# Altium PCB hv_psu_v100.PcbDoc
Units mil, origin at the board's own origin, x right, y up, seen from the top; angles counter-clockwise.
Board outline 3543.31 x 2559.06 mil, 2 copper layers (Top Layer, Bottom Layer); 106 components, 56 nets, 254 pads, 85 vias.
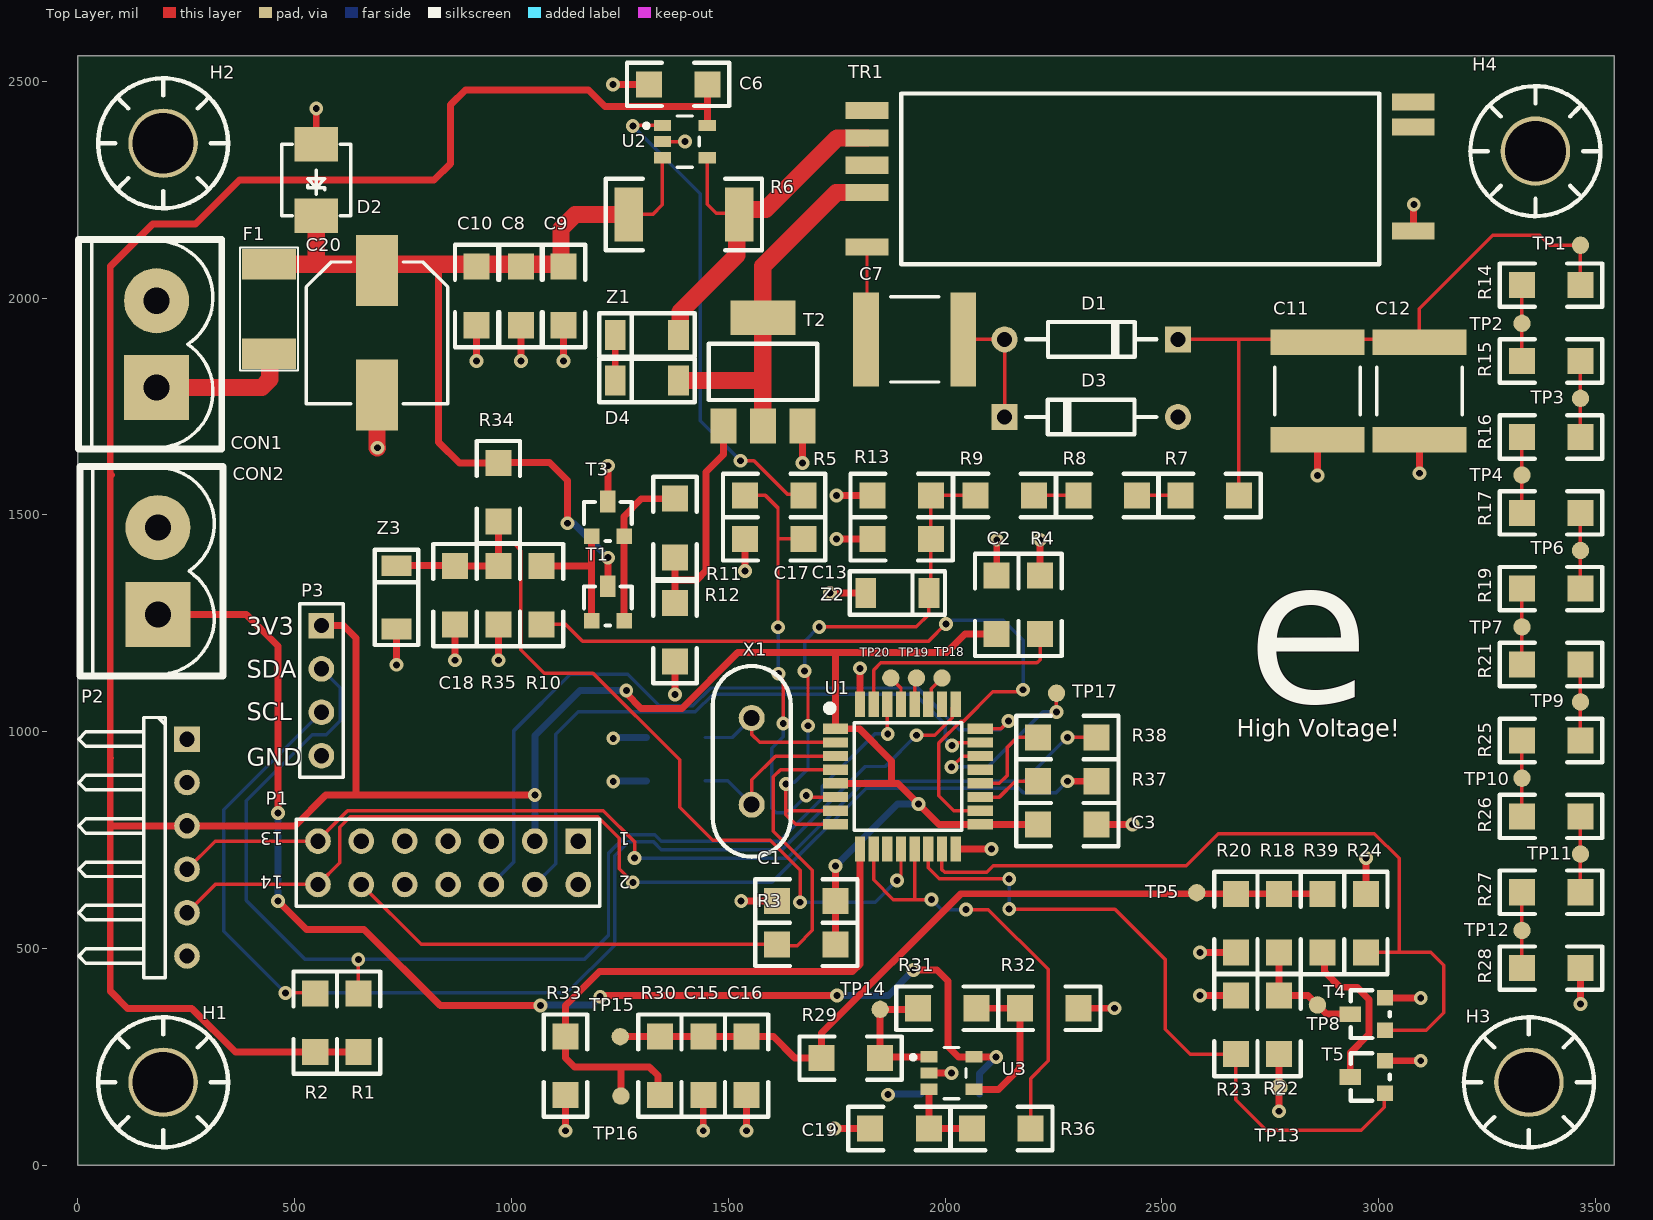
[diagram p0: Top Layer view]
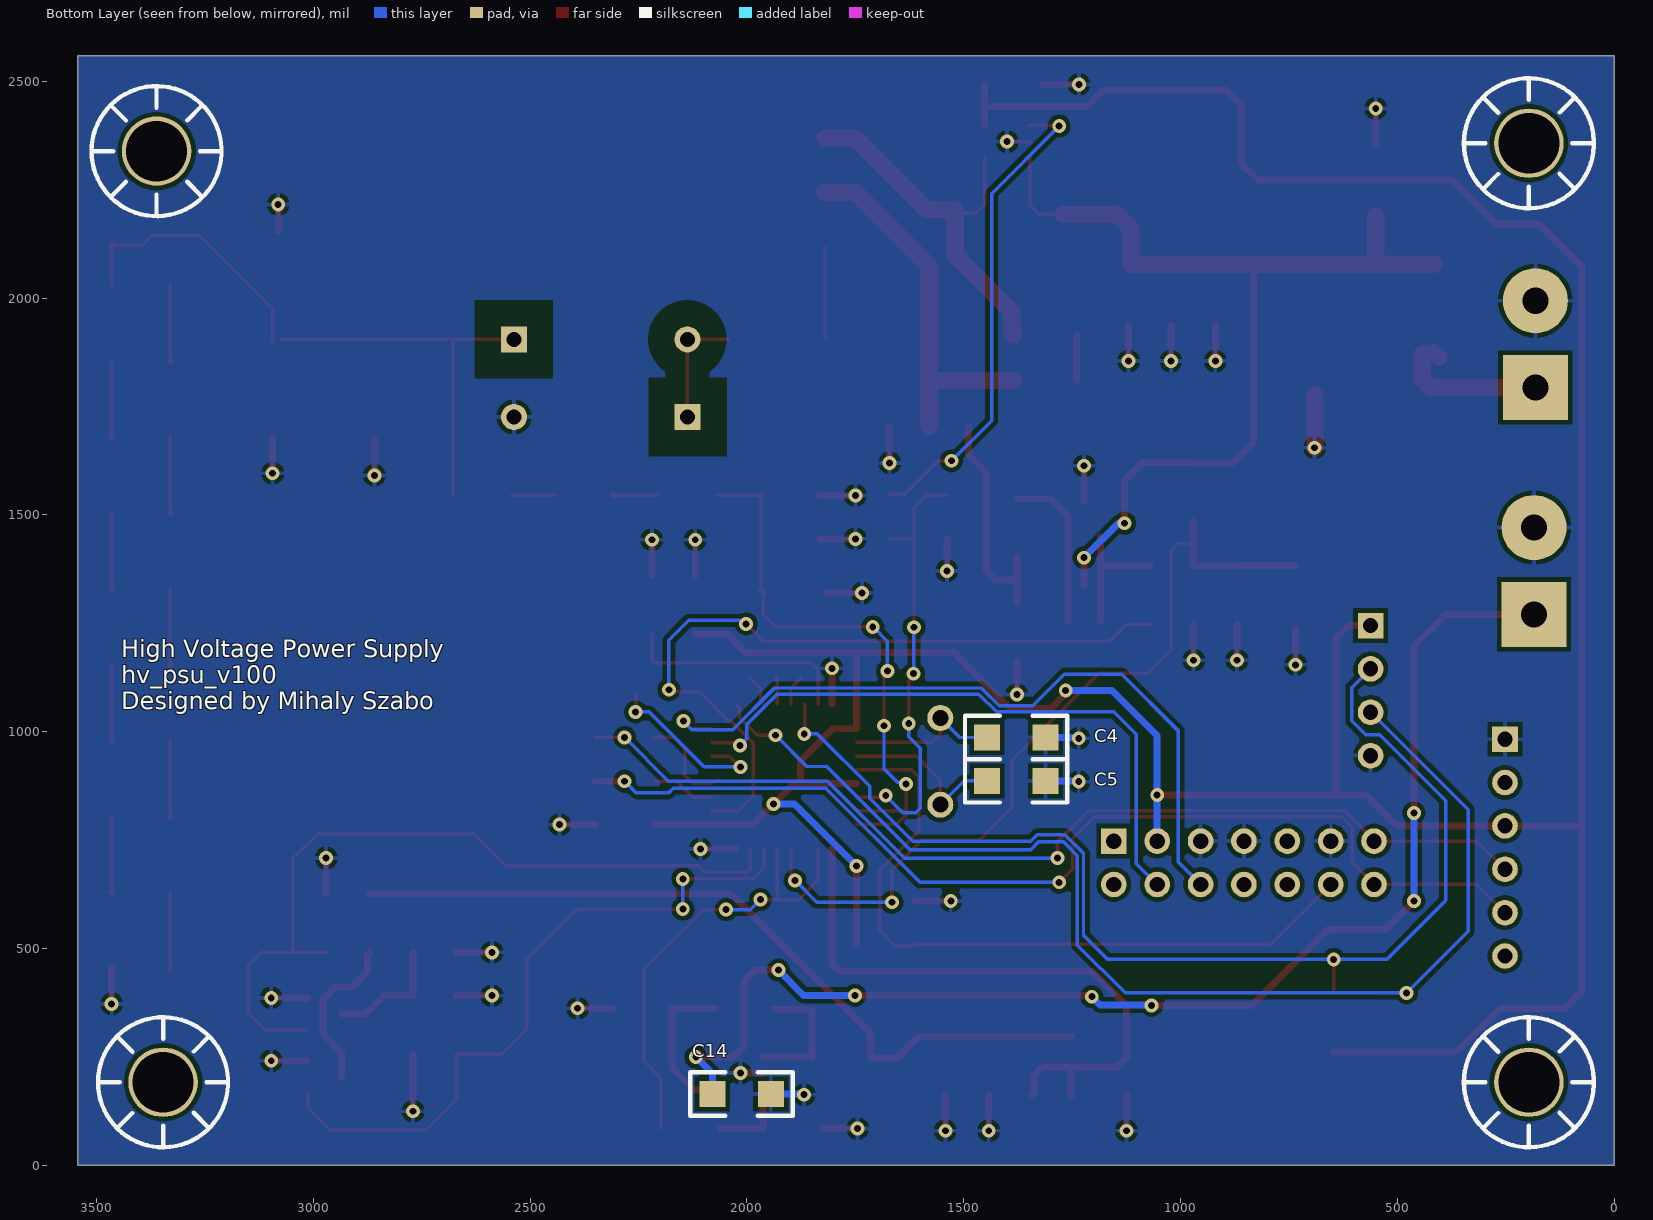
[diagram p1: Bottom Layer view, seen from below]
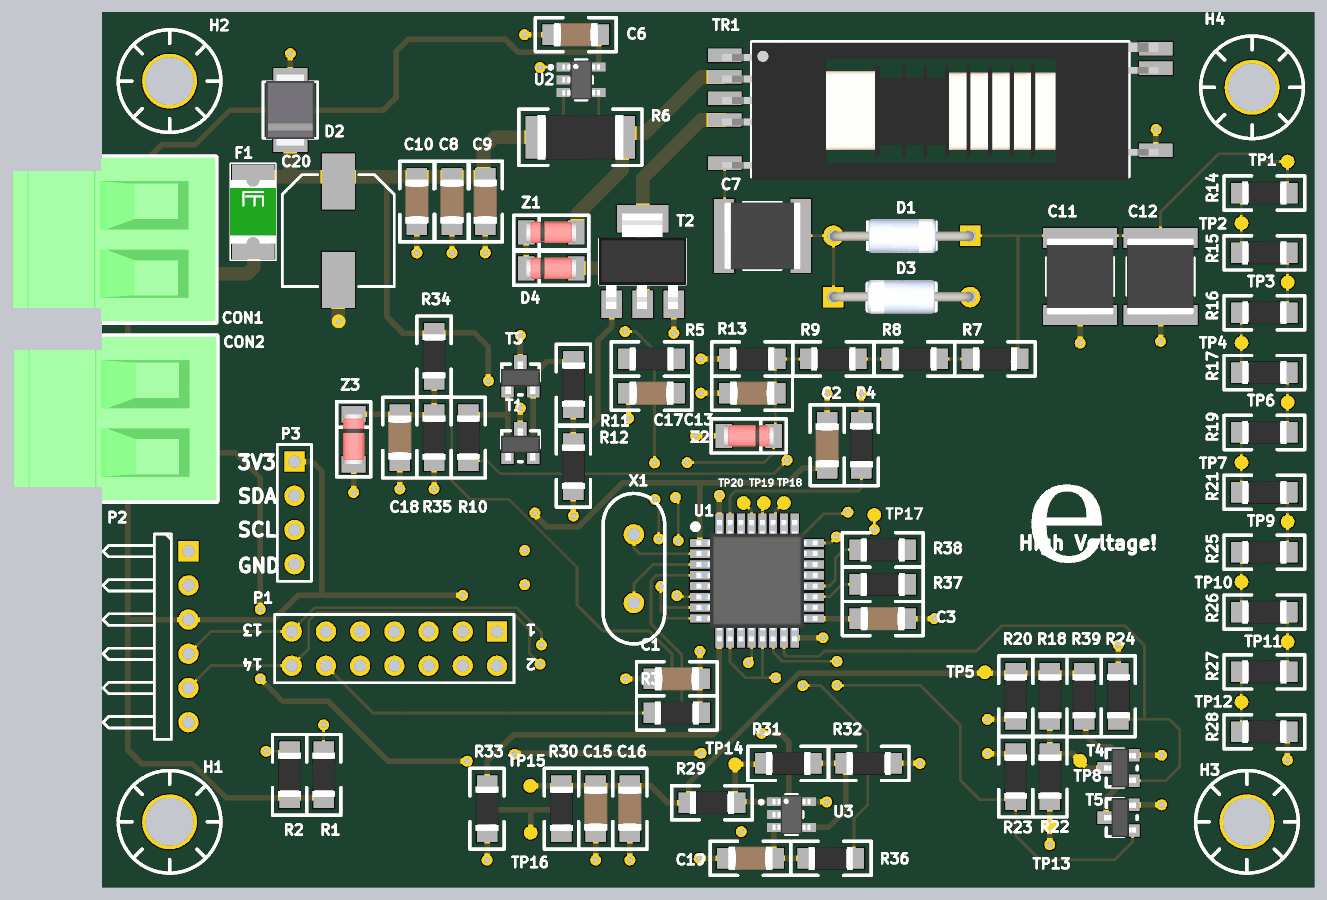
[diagram p2: 3D render of the assembled board from above, using the file's embedded part models]
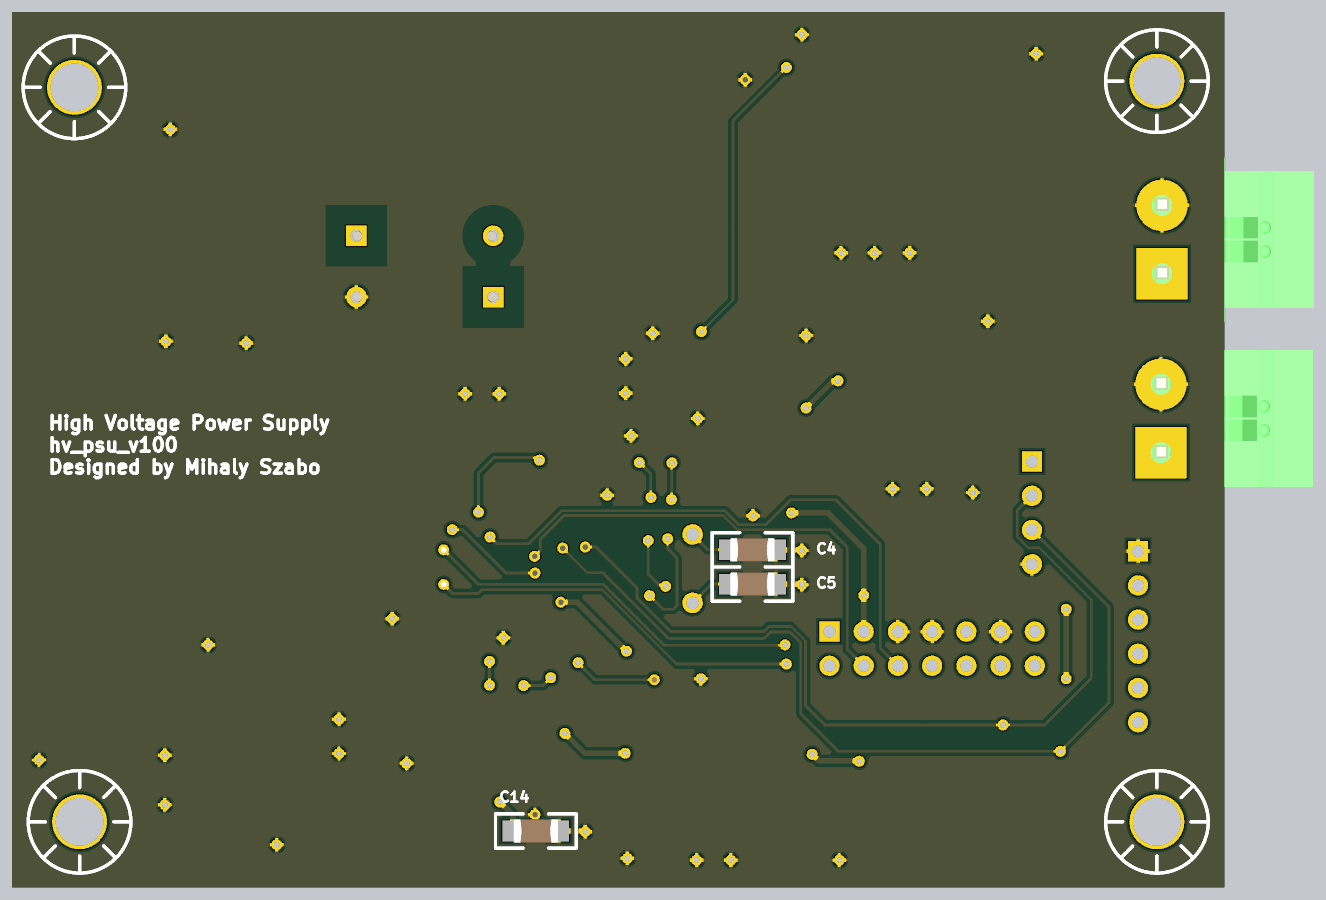
[diagram p3: 3D render of the assembled board from below, using the file's embedded part models]

## Layer stack, top to bottom
Top Solder: solder mask 0.4, Solder Resist, Dk 3.5
Top Layer: signal copper 1.4
Dielectric 1: dielectric 12.6, FR-4, Dk 4.8
Bottom Layer: signal copper 1.4
Bottom Solder: solder mask 0.4, Solder Resist, Dk 3.5

## Board outline
0,0 3543.31,0 3543.31,2559.06 0,2559.06

## Design rules (kind name [scope] priority, off if disabled: settings)
Clearance HV_CLEARANCE [InNetClass('HV')] p1: gap=60 ignorepadtopadclearanceinfootprint=FALSE except(10: Arc-Hole Track-Hole SMDPad-Hole THPad-Hole Via-Hole Fill-Hole Poly-Hole Region-Hole Text-Hole)
Clearance [All] p2: gap=6 ignorepadtopadclearanceinfootprint=TRUE except(0: Arc-Hole Track-Hole SMDPad-Hole THPad-Hole Via-Hole Fill-Hole Poly-Hole Region-Hole Text-Hole; 10: Arc-Fill Arc-Poly Arc-Region Track-Fill Track-Poly Track-Region SMDPad-Fill SMDPad-Poly SMDPad-Region THPad-Fill THPad-Poly THPad-Region Via-Fill Via-Poly Via-Region Fill-Fill Fill-Poly Fill-Region Poly-Poly Poly-Region Region-Region)
HoleSize [All] p1: absolutevalues=TRUE maxlimit=400 minlimit=1 maxpercent=80.000 minpercent=20.000
PolygonConnect [All] p1: connectstyle=Relief reliefconductorwidth=10 reliefentries=4 polygonreliefangle="90 Angle" airgapwidth=10
RoomDefinition U_hv_psu_v100_TESTLOAD [InComponentClass('U_hv_psu_v100_TESTLOAD')] p1 off: confinementstyle=ConfineIn formatcopy=TRUE lockcomponents=FALSE outline 3277.5,348.5 3810.5,348.5 3810.5,2874 3277.5,2874
RoomDefinition U_hv_psu_v100_MCU [InComponentClass('U_hv_psu_v100_MCU')] p2 off: confinementstyle=ConfineIn formatcopy=TRUE lockcomponents=FALSE outline 1124.25,751.85 2774.25,751.85 2774.25,1691.85 1124.25,1691.85
RoomDefinition U_hv_psu_v100_LINREG [InComponentClass('U_hv_psu_v100_LINREG')] p3 off: confinementstyle=ConfineIn formatcopy=TRUE lockcomponents=FALSE outline 1352.5,50 2382.5,50 2382.5,705 1352.5,705
RoomDefinition U_hv_psu_v100_FLYBACK [InComponentClass('U_hv_psu_v100_FLYBACK')] p4 off: confinementstyle=ConfineIn formatcopy=TRUE lockcomponents=FALSE outline 472.5,1760 3232.5,1760 3232.5,3132.52 472.5,3132.52
RoomDefinition U_hv_psu_v100_CON [InComponentClass('U_hv_psu_v100_CON')] p5 off: confinementstyle=ConfineIn formatcopy=TRUE lockcomponents=FALSE outline -115,582.31 345,582.31 345,2515 -115,2515
RoutingVias [All] p1: holewidth=16 width=32 viastyle="Through Hole" minholewidth=16 minwidth=32 maxholewidth=16 maxwidth=32
SilkToSilkClearance [All] p1 off: silktosilkclearance=10
SilkToSolderMaskClearance [IsPad] p1 off: minsilkscreentomaskgap=10 clearancetoexposedcopper=TRUE
SolderMaskExpansion [All] p1: expansion=4 istentingtop=FALSE
Width [All] p1: maxlimit=40 minlimit=8 preferedwidth=16 minimp=50.000000 maximp=50.000000 favimp=50.000000
27 further rules are at their usual default settings.

## Classes and differential pairs
net class HV: +HV NetC7_1 NetC7_2 NetR14_1 NetR15_1 NetR16_1 NetR17_1 NetR19_1 NetR21_1 NetR25_1 NetR26_1 NetR27_1
component class U_hv_psu_v100_TESTLOAD: R14 R15 R16 R17 R18 R19 R20 R21 R22 R23 R24 R25 R26 R27 R28 R39 T4 T5 TP1 TP2 TP3 TP4 TP5 TP6 TP7 TP8 TP9 TP10 TP11 TP12 TP13
component class U_hv_psu_v100_MCU: C1 C2 C3 C4 C5 P1 R1 R2 R3 R4 R37 R38 TP18 TP19 TP20 U1 X1
component class U_hv_psu_v100_MAIN: H1 H2 H3 H4 TP17
component class U_hv_psu_v100_LINREG: C14 C15 C16 C19 R29 R30 R31 R32 R33 R36 TP14 TP15 TP16 U3
component class U_hv_psu_v100_FLYBACK: C6 C7 C8 C9 C10 C11 C12 C13 C17 C18 C20 D1 D2 D3 D4 F1 R5 R6 R7 R8 R9 R10 R11 R12 R13 R34 R35 T1 T2 T3 TR1 U2 Z1 Z2 Z3
component class U_hv_psu_v100_CON: CON1 CON2 P2 P3

## Components (designator, comment, footprint, x,y, rotation, side; value= is the part's Value field where it differs from the comment)
C1 "100nF" 1206_C 1675,605 r0 top
C2 "100nF" 1206_C 2114.25,1297.85 r270 top
C3 "100nF" 1206_C 2287,791 r180 top
C4 "15pF" 1206_C 1384.25,981.85 r180 bottom
C5 "15pF" 1206_C 1384.25,881.85 r180 bottom
C6 "100nF" 1206_C 1379.5,2488 r0 top
C7 "10nF/3kV" 2220_C 1930,1905 r180 top
C8 "10uF" 1206_C 1027.5,2000 r90 top
C9 "100nF" 1206_C 1125,2000 r90 top
C10 "100nF" 1206_C 925,2000 r90 top
C11 "10nF / 3kV" 2220_C 2859,1786 r270 top
C12 "10nF / 3kV" 2220_C 3094,1786 r270 top
C13 "-" 1206_C 1895,1440 r0 top
C14 "100nF" 1206_C 2007.5,170 r0 bottom
C15 "100nF" 1206_C 1447.5,225 r90 top
C16 "100nF" 1206_C 1547.5,225 r90 top
C17 "-" 1206_C 1601,1440 r0 top
C18 "-" 1206_C 875,1310 r90 top
C19 "-" 1206_C 1890,80 r0 top
C20 "470uF" CAPAE9383X110M 690,1920 r270 top
CON1 "STLZ 2 Pole" "CON_STLZ_950WV2 + AKZ 950/2" 182,1794 r90 top
CON2 "STLZ 2 Pole" "CON_STLZ_950WV2 + AKZ 950/2" 185,1271 r90 top
D1 "DIODE" DIODE_400MIL 2332.5,1910 r180 top
D2 "SMBJ12A" "DO-214AA (SMB)" 550,2355 r270 top
D3 "DIODE" DIODE_400MIL 2342,1721 r0 top
D4 "DIODE" SMD_DIODE_SOD80 1307.5,1810 r0 top
F1 "1A" FUSE_1812L 441,1975 r180 top
H1 "HOLE" HOLE_140_160MIL 196.85,196.85 r0 top
H2 "HOLE" HOLE_140_160MIL 196.85,2362.2 r0 top
H3 "HOLE" HOLE_140_160MIL 3346.46,196.85 r0 top
H4 "HOLE" HOLE_140_160MIL 3361.46,2344.06 r0 top
P1 "Header 7X2" HDR2X7 1154,748 r180 top
P2 "Header 6H" HDR1X6H 252,983 r270 top
P3 "Header 4" HDR1X4 562,1245 r270 top
R1 "10k" 1206 647.75,329.15 r90 top
R2 "10k" 1206 547.75,329.15 r90 top
R3 "10k" 1206 1680,510 r180 top
R4 "10k" 1206 2219.25,1292.85 r90 top
R5 "0R" 1206 1606,1545 r180 top
R6 "100mR" 2512 1398,2193 r0 top
R7 "3.3M" 1206 2610,1545 r0 top
R8 "3.3M" 1206 2375,1545 r0 top
R9 "3.3M" 1206 2137.5,1545 r0 top
R10 "330R" 1206 1070,1315 r90 top
R11 "20R" 1206 1377.5,1470 r270 top
R12 "10k" 1206 1377.5,1230 r90 top
R13 "10k" 1206 1900,1545 r0 top
R14 "330k" 1206 3397.5,2030 r0 top
R15 "330k" 1206 3397.5,1855 r180 top
R16 "330k" 1206 3397.5,1680 r0 top
R17 "330k" 1206 3397.5,1505 r180 top
R18 "510R" 1206 2770.5,559 r90 top
R19 "330k" 1206 3397.5,1330 r0 top
R20 "100k" 1206 2670.5,559 r90 top
R21 "330k" 1206 3397.5,1155 r180 top
R22 "1k" 1206 2770.5,324 r90 top
R23 "10k" 1206 2670.5,324 r270 top
R24 "10k" 1206 2970.5,559 r270 top
R25 "330k" 1206 3397.5,980 r0 top
R26 "330k" 1206 3397.5,805 r180 top
R27 "330k" 1206 3397.5,630 r0 top
R28 "330k" 1206 3397.5,455 r180 top
R29 "4R7" 1206 1782.5,247.5 r180 top
R30 "110k" 1206 1342.5,230 r90 top
R31 "200k" 1206 2005.5,362.5 r180 top
R32 "18k" 1206 2240.5,362.5 r180 top
R33 "10k" 1206 1125,230 r90 top
R34 "18k" 1206 970,1552.5 r90 top
R35 "10k" 1206 970,1315 r90 top
R36 "0R" 1206 2130,85 r180 top
R37 "330R" 1206 2282,886 r0 top
R38 "330R" 1206 2282,987 r0 top
R39 "1k" 1206 2870.5,559 r90 top (schematic designator 3.3k)
T1 "BC817" SOT23 1222.5,1290 r0 top
T2 "N-MOSFET" SOT233-1 1580,1835 r0 top
T3 "BC807" SOT23 1222.5,1485 r0 top
T4 "MMBF170" SOT23 2980.5,349 r90 top
T5 "MMBF170" SOT23 2980.5,204 r90 top
TP1 "?" PAD_40 3465.5,2122 r90 top
TP2 "?" PAD_40 3330.5,1942 r90 top
TP3 "?" PAD_40 3465.5,1769 r90 top
TP4 "?" PAD_40 3330.5,1592 r90 top
TP5 "?" PAD_40 2580.5,629 r90 top
TP6 "?" PAD_40 3465.5,1418 r90 top
TP7 "?" PAD_40 3330.5,1242 r90 top
TP8 "?" PAD_40 2858.75,370.25 r90 top
TP9 "?" PAD_40 3465.5,1069 r90 top
TP10 "?" PAD_40 3330.5,893 r90 top
TP11 "?" PAD_40 3465.5,718 r90 top
TP12 "?" PAD_40 3330.5,542 r90 top
TP13 "?" PAD_40 2770,180 r90 top
TP14 "?" PAD_40 1850.5,360 r90 top
TP15 "?" PAD_40 1251,297 r90 top
TP16 "?" PAD_40 1252.5,160 r90 top
TP17 "?" PAD_40 2257,1089 r90 top
TP18 "?" PAD_40 1993,1124 r90 top
TP19 "?" PAD_40 1934,1124 r90 top
TP20 "?" PAD_40 1875,1124 r90 top
TR1 "DARFON_CCFL_TRANSFORMER" DARFON_CCFL_TRANSFORMER 2460,2285 r0 top
U1 "STM32F301K6T6" QFP80P900X900X160-32N 1914.25,896.85 r0 top
U2 "INA180A2IDBVR" SOT23-5 1400,2361 r0 top
U3 "OPA992-Q1" SOT23-5 2015,213 r0 top
X1 "8MHz" XTAL_SMALL 1554.25,926.85 r90 top
Z1 "20V Vbr" SMD_DIODE_SOD80 1307.5,1915 r0 top
Z2 "3.6V Vbr" SMD_DIODE_SOD80 1895,1320 r180 top
Z3 "3.6V Vbr" SMD_DIODE_SOD80 735,1315 r270 top

## Footprints (in the part's own frame and the unit in brackets; to place one, negate y for a bottom-side part, rotate by r counter-clockwise, add the part's x,y. Pads: shape width x height; smd on the part's side, far side on the other; paste and mask are expansions set on the pad)
1206 [mil]
  rect 60x60 smd: 1(-67.5,0) 2(67.5,0)
  silkscreen extent -118,-50 118,50, body extent -65,-33 65,33, height 26
1206_C [mil]
  rect 60x60 smd: 1(-62.5,5) 2(72.5,5)
  silkscreen extent -113,-45 123,55, body extent -61,-29 71,39, height 39
2220_C [mm] "Chip Capacitor, Body 5.7x5.0mm, IPC High Density"
  rect 1.5x5.5 smd: 1(-2.85,0) 2(2.85,0)
  silkscreen extent -1.4,-2.5 1.4,2.5, body extent -2.85,-2.5 2.85,2.5, height 2.5
2512 [mil]
  rect 65x125 smd: 1(-127.5,0) 2(127.5,0)
  silkscreen extent -180,-82 180,82, body extent -126,-65 126,65, height 26
CAPAE9383X110M [mm] "Aluminum Electrolytic Capacitor, Body 8,30x8,30x11,00mm, IPC Low Density"
  rect 4.15x2.45 smd: 1(-3.65,0) 2(3.65,0)
  silkscreen extent -4.15,-4.15 4.15,4.15, body extent -4.15,-4.15 4.15,4.15, height 11
"CON_STLZ_950WV2 + AKZ 950/2" [mil]
  rect 150x150 hole 60: 1(0,0)
  round 150 hole 60: 2(200,0)
  silkscreen extent -142,-150 341,180, body extent -139,-150 339,445, height 838
DARFON_CCFL_TRANSFORMER [mm]
  rect 2.5x1 smd: 1(-16.254,3.746) 2(-16.254,2.146) 3(-16.254,0.546) 4(-16.254,-1.054) 5(15.746,2.796) 6(-16.254,-4.254) 7(15.746,-3.304) 8(15.746,4.246)
  silkscreen extent -14.25,-5.25 13.75,4.75, body extent -16.45,-5.51 15.95,4.7, height 5.22
DIODE_400MIL [mil]
  rect 60x60 / inner round 60 / far side rect 60x60 hole 35: 1(-205,5)
  round 60 hole 35: 2(195,5)
  silkscreen extent -155,-35 145,45, body extent -216,-43 205,55, height 101
"DO-214AA (SMB)" [mil] "SMB"
  rect 80x100 smd: A(0,0) K(165,0)
  silkscreen extent 0,-80 165,80, body extent -24,-71 189,71, height 92
FUSE_1812L [mm]
  rect 3.15x1.78 smd: 1(0,2.615) 2(0,-2.615)
  silkscreen extent -1.7,-3.6 1.7,3.6, body extent -1.71,-2.36 1.71,2.36, height 1.34
HDR1X4 [mm] "Connector; Header; 4 Position"
  rect 1.5x1.5 hole 0.9: 1(0,0)
  round 1.5 hole 0.9: 2(2.54,0) 3(5.08,0) 4(7.62,0)
  silkscreen extent -1.27,-1.27 8.89,1.27
HDR1X6H [mm] "Connector; Header; 6 Position; Right Angle"
  rect 1.5x1.5 hole 0.9: 1(0,0)
  round 1.5 hole 0.9: 2(2.54,0) 3(5.08,0) 4(7.62,0) 5(10.16,0) 6(12.7,0)
  silkscreen extent -1.27,-6.35 13.97,-1.27
HDR2X7 [mm] "Connector; Header; 7x2 Position"
  rect 1.5x1.5 hole 0.9: 1(0,0)
  round 1.5 hole 0.9: 2(0,2.54) 3(2.54,0) 4(2.54,2.54) 5(5.08,0) 6(5.08,2.54) 7(7.62,0) 8(7.62,2.54) 9(10.16,0) 10(10.16,2.54) 11(12.7,0) 12(12.7,2.54) 13(15.24,0) 14(15.24,2.54)
  silkscreen extent -1.27,-1.27 16.51,3.81
HOLE_140_160MIL [mil]
  round 160 hole 140 unplated: 1(0,-5)
  silkscreen extent -150,-155 150,145
PAD_40 [mil]
  round 40 smd paste-78.74: 1(0,0)
QFP80P900X900X160-32N [mm]
  rect 1.475x0.6 smd: 1(-4.238,2.8) 2(-4.238,2) 3(-4.238,1.2) 4(-4.238,0.4) 5(-4.238,-0.4) 6(-4.238,-1.2) 7(-4.238,-2) 8(-4.238,-2.8) 17(4.238,-2.8) 18(4.238,-2) 19(4.238,-1.2) 20(4.238,-0.4) 21(4.238,0.4) 22(4.238,1.2) 23(4.238,2) 24(4.238,2.8)
  rect 0.6x1.475 smd: 9(-2.8,-4.238) 10(-2,-4.238) 11(-1.2,-4.238) 12(-0.4,-4.238) 13(0.4,-4.238) 14(1.2,-4.238) 15(2,-4.238) 16(2.8,-4.238) 25(2.8,4.238) 26(2,4.238) 27(1.2,4.238) 28(0.4,4.238) 29(-0.4,4.238) 30(-1.2,4.238) 31(-2,4.238) 32(-2.8,4.238)
  silkscreen extent -4.77,-3.15 3.15,4.2, body extent -4.5,-4.5 4.5,4.5, height 1.6
SMD_DIODE_SOD80 [mil]
  rect 48x70 smd: 1(-68,0) 2(78,0)
  silkscreen extent -105,-50 115,50, body extent -68,-32 78,32, height 63
SOT23 [mil]
  rect 36x36 smd: 1(-37.5,-34) 2(37.5,-34)
  rect 36x50 smd: 3(0,46)
  silkscreen extent -55,-45 55,45, body extent -57,-42 57,52, height 44
SOT23-5 [mm]
  rect 1x0.66 smd paste+0 mask+0: 1(-1.315,0.95) 2(-1.315,0) 3(-1.315,-0.95) 4(1.315,-0.95) 5(1.315,0.95)
  silkscreen extent -2.37,-1.5 0.85,1.5, body extent -1.4,-1.45 1.4,1.45, height 1.45
SOT233-1 [mil]
  rect 60x80 smd: 1(-91,-130) 2(0,-130) 3(91,-130)
  rect 150x80 smd: 4(0,120)
  silkscreen extent -125,-70 125,60, body extent -128,-144 128,135, height 63
XTAL_SMALL [mil]
  round 60 hole 37: 1(-95,0) 2(105,0)
  silkscreen extent -215,-90 225,90, body extent -223,-98 223,98, height 145

## Part data
C1 C2 C3 C4 C5 C6 C7 C8 C9 C10 C11 C12 C13 C14 C15 C16 C17 C18 C19: library part CAPACITOR
  C7 C11 C12: Parameter 1=2220HC103KAT1A
C20: library part CAPACITOR_ELCO
D2: library part DIODE_TVS
F1: library part FUSE
P1: "Header, 7-Pin, Dual row", LatestRevisionDate=17-Jul-2002, LatestRevisionNote="Re-released for DXP Platform.", Publisher="Altium Limited"
P2: "Header, 6-Pin, Right Angle", LatestRevisionDate=17-Jul-2002, LatestRevisionNote="Re-released for DXP Platform.", Publisher="Altium Limited"
P3: "Header, 4-Pin", LatestRevisionDate=17-Jul-2002, LatestRevisionNote="Re-released for DXP Platform.", Publisher="Altium Limited"
R1 R2 R3 R4 R5 R6 R7 R8 R9 R10 R11 R12 R13 R14 R15 R16 R17 R18 R19 R20 R21 R22 R23 R24 R25 R26 R27 R28 R29 R30 R31 R32 R33 R34 R35 R36 R37 R38 R39: library part RESISTOR, Parameter 1=10k
T1: library part TRANSISTOR_NPN
T2: library part IRLL110, "Power N-MOSFET 100V@1.5A 500mR 1.25W SOT223"
T3: library part TRANSISTOR_PNP
T4 T5: "N MOSFET"
TP1 TP2 TP3 TP4 TP5 TP6 TP7 TP8 TP9 TP10 TP11 TP12 TP13 TP14 TP15 TP16 TP17 TP18 TP19 TP20: library part TESTPOINT
U1: "ARM Microcontrollers - MCU Mainstream Mixed signals MCUs ARM Cortex-M4 core with DSP and FPU, 64 Kbytes Flash, 72 MHz CPU, 12-bit ADC 5 MSPS, Comparator, Op-Amp", Manufacturer_Name=STMicroelectronics, Mouser Part Number=511-STM32F301K6T6, Arrow Part Number=STM32F301K6T6, Arrow Price/Stock=https://www.arrow.com/en/products/stm32f301k6t6/stmicroelectronics, Datasheet Link=https://componentsearchengine.com/Datasheets/1/STM32F301K6T6.pdf, Geometry.Height=1.6mm, Manufacturer_Part_Number=STM32F301K6T6, Mouser Price/Stock=https://www.mouser.co.uk/ProductDetail/STMicroelectronics/STM32F301K6T6?qs=lYGu3FyN48diEpbf2nZa%2Fg%3D%3D
U2: "Current Sense Amplifiers MULTI CHANNEL CURRENT SENSE L/H SIDE", Manufacturer_Name="Texas Instruments", Mouser Part Number=595-INA180A2IDBVR, Datasheet Link=http://www.ti.com/lit/ds/symlink/ina180.pdf, Geometry.Height=1.45mm, Manufacturer_Part_Number=INA180A2IDBVR, Mouser Price/Stock=https://www.mouser.co.uk/ProductDetail/Texas-Instruments/INA180A2IDBVR?qs=5aG0NVq1C4wYcJfa99BoHg%3D%3D
U3: "OPA992-Q1 Automotive, 40-V Rail-to-Rail Input or Output, / Low Offset Voltage, Low Noise Op Amp GBW 10.6MHz", Manufacturer_Name="Texas Instruments", Manufacturer_Part_Number=INA180A2IDBVR, Mouser Part Number=595-INA180A2IDBVR, Datasheet Link=http://www.ti.com/lit/ds/symlink/ina180.pdf, Geometry.Height=1.45mm, Mouser Price/Stock=https://www.mouser.co.uk/ProductDetail/Texas-Instruments/INA180A2IDBVR?qs=5aG0NVq1C4wYcJfa99BoHg%3D%3D
X1: library part XTAL
Z1 Z2 Z3: library part DIODE_ZENER

## Via types
v1: diameter 32, hole 16, Top Layer to Bottom Layer, 85 vias

## Nets (pads, with @x,y where several pads share a name; then routed paths per layer and width w, separated by ;. In a path a pad name is that pad's centre, name@x,y a point inside that pad or via, vN(x,y) a via of type N, cw(c..) or ccw(c..) an arc to the next point about the centre after c; other vN are vias at no path point)
+3V3: C1.2 C2.2 C3.2 C6.2 P1.3 P2.3 P3.1 R1.1 R2.1 R3.1 U1.1 U1.5 U1.17 U2.5 | length 8277.3
  Top Layer w16: 76,940 75,939 ; 77.8,1592.2 75,1595 ; P3.1 613.37,1245 641.75,1216.62 641.75,854 ; R1.1 R2.1 363.35,261.65 263,362 115,362 75,402 75,783.17 ; v1(1054,854) 641.75,854 ; v1(1265,1095) 1265,1088 1299,1054 1393,1054 1522,1183 1749,1183 ; U2.5 1451.77,2445.59 ; C6.2 1451.77,2492.77 1451.77,2445.59 ; U1.5 1877,881.1 ; R3.1 C1.2 v1(1747.5,690.5) ; C2.2 2046.35,1225.35 2004,1183 1749,1183 ; C3.2@2214.75,785.85 2081.87,785.85 U1.17 1986.39,786.61 v1(1939.14,833.86) 1891.9,881.1 1877,881.1 ; 75,783.17 75,939 ; 75,783.17 75.17,783 P2.3 501,783 572,854 641.75,854 ; 75,939 75,1595 ; 75,1595 75,2073 173,2171 272,2171 373,2272 822,2272 860,2310 860,2446 894,2480 1178,2480 1216,2442 1448.19,2442 1451.77,2445.59 ; 1749,1183 1747.4,1181.4 U1.1 1802.91,1007.09 1877,933 1877,881.1
  Bottom Layer w16: P1.3 v1(1054,854) 1054,991 1158,1095 v1(1265,1095) ; v1(1747.5,690.5) 1890.86,833.86 v1(1939.14,833.86)
+HV: C11.1 C12.1 D1.1 R7.2 R14.2 TP1.1 | length 1517.8
  Top Layer w8: D1.1 2677.5,1905 ; R7.2 2677.5,1905 ; C12.1@3074.27,1905 2677.5,1905 ; C12.1 3094,1976 3263,2145 3371.17,2145 3394.17,2122 TP1.1 ; R14.2 TP1.1@3465,2121.5
  Top Layer w16: TP1.1@3465,2121.5 TP1.1
+VDET: C15.2 C16.2 R18.2 R20.2 R29.2 R30.2 R39.2 TP5.1 TP15.1 | length 1830.7
  Top Layer w16: TP15.1 1604,297 1653.5,247.5 R29.2 1715,305 2036.5,626.5 R20.2 R18.2 R39.2
+VDET_PROT: C14.2 CON2.1 U3.5 | length 2957.3
  Top Layer w16: CON2.1 388.64,1271 462,1197.64 v1(462,813) ; v1(462,610) 527.42,544.58 660.42,544.58 836,369 v1(1067,369) ; v1(1204.87,389.15) 1208.02,392.3 v1(1751.19,392.3) ; v1(1927.74,450.43) 1928.3,451 1981,451 2006.73,425.27 2006.73,274.27 2030.6,250.4 U3.5 2117.6,250.4 v1(2118,250)
  Bottom Layer w16: v1(462,610) v1(462,813) ; v1(1067,369) 1068,370 1185.72,370 v1(1204.87,389.15) ; v1(1751.19,392.3) 1869.6,392.3 v1(1927.74,450.43) ; C14.2 2080,212 v1(2118,250)
+VIN: CON1.1 F1.1 | length 343
  Top Layer w40: CON1.1 424,1794 443,1813 443,1870.05 F1.1 ; F1.1@404.95,1864 F1.1@415,1874.05
GND: C1.1 C2.1 C3.1 C4.2 C5.2 C6.1 C8.1 C9.1 C10.1 C11.2 C12.2 C13.1 C14.1 C15.1 C16.1 C17.1 C18.1 C19.1 C20.2 CON1.2 CON2.2 D2.A D3.2 P1.5 P1.7 P1.11 P2.1 P3.4 R4.2 R12.1 R13.1 R20.1 R22.1 R23.1 R24.1 R28.1 R32.1 R33.1 R35.1 T2.3 T3.3 T4.2 T5.2 TP13.1 TR1.7 U1.16 U1.32 U2.2 U3.2 Z2.2 Z3.2 | length 3441.8
  Top Layer w8: U2.2 v1(1400,2361)
  Top Layer w16: D2.A v1(550,2437.5) ; v1(735,1154.5) Z3.2 ; v1(870,1165) C18.1 ; v1(920,1855) C10.1 ; v1(970,1165) R35.1 ; v1(1022.5,1855) C8.1 ; v1(1120,1855) C9.1 ; v1(1125,80) R33.1 ; T3.3 v1(1222.5,1613.5) ; v1(1234.5,2493) C6.1 ; v1(1377.5,1086) R12.1 ; v1(1442.5,80) C15.1 ; v1(1530,610) C1.1 ; C17.1 1538.5,1371.5 v1(1539,1371) ; v1(1542.5,80) C16.1 ; v1(1671,1619.95) T2.3@1671,1702.46 ; v1(1734.5,1320) Z2.2 ; v1(1745,85) C19.1 ; v1(1750,1445) C13.1 ; v1(1750,1545) R13.1 ; U1.32@1804.17,1063.95 v1(1804.17,1146.45) ; U3.2 v1(2015,213) ; U1.16@2024.74,729.85 v1@2107.24,729.85 ; C2.1 v1(2119.25,1442.85) ; R4.2 v1(2219.26,1442.85) ; R32.1 v1(2390.5,362.5) ; C3.1@2349.75,785.85 v1@2432.25,785.85 ; v1(2588,391.5) R23.1 ; v1(2588,491.5) R20.1 ; v1(2770,125) 2770.5,125.5 R22.1 ; v1(2859,1591.29) C11.2 ; R24.1 v1(2970.5,709) ; T5.2 v1(3097,241.5) ; T4.2 v1(3097,386.5) ; TR1.7 3079.92,2214.92 v1(3081,2216) ; v1(3094,1596.29) C12.2@3094,1678.8 ; v1(3465,372.5) R28.1
  Top Layer w40: C20.2 690,1656 v1(691,1655)
  Bottom Layer w16: v1(1235,885) 1236.85,886.85 C5.2 ; v1(1235,985) 1236.85,986.85 C4.2 ; v1(1868.25,163.15) 1870.1,165 C14.1
  other v1: 2107.24,729.85 2432.25,785.85
NetC4_1: C4.1 U1.2 X1.2 | length 364.9
  Top Layer w8: X1.2 1554.25,993.75 1572.41,975.59 U1.2
  Bottom Layer w8: C4.1 1509.25,986.85 X1.2
NetC5_1: C5.1 U1.3 X1.1 | length 403.5
  Top Layer w8: X1.1 1554.25,889.25 1609.09,944.09 U1.3
  Bottom Layer w8: C5.1 1499.25,886.85 X1.1
NetC7_1: C7.1 D1.2 D3.1 | length 274.5
  Top Layer w8: C7.1 D1.2 2137.5,1726.5 D3.1
NetC7_2: C7.2 TR1.6 | length 213.5
  Top Layer w8: C7.2 1820.08,1907.28 TR1.6
NetC8_2: C8.2 C9.2 C10.2 C20.1 D2.K F1.2 R6.1 R34.2 T1.3 U2.3 | length 2293.9
  Top Layer w8: R6.1 1326,2193 1348.23,2215.23 U2.3
  Top Layer w16: 832.27,2077.95 832.27,1667.73 880,1620 R34.2 971,1621 1088,1621 1129.06,1579.94 v1(1129.06,1480.94) ; T1.3 v1(1222.5,1401.5)
  Top Layer w40: F1.2@415,2077.95 550,2077.95 ; D2.K 550,2077.95 ; R6.1 1147,2193 1114.55,2160.55 1114.55,2077.95 1022.5,2077.95 920,2077.95 832.27,2077.95 690,2077.95 550,2077.95
  Bottom Layer w16: v1(1129.06,1480.94) 1143.06,1480.94 v1(1222.5,1401.5)
NetC13_2: C13.2 R9.1 R13.2 U1.7 U1.8 Z2.1 | length 1362.9
  Top Layer w8: v1(1633,880) 1633,818.11 ; v1(1676,1140) 1676,1133.51 1684,1125.51 v1(1684,1014) ; v1(1710,1242) 1934,1242 1963,1271 Z2.1 ; U1.8 1655.43,786.61 1633,809.05 1633,818.11 ; U1.7 1633,818.11 ; Z2.1@1967.5,1324.5 C13.2 R13.2 R9.1
  Top Layer w16: Z2.1 Z2.1@1967.5,1324.5
  Bottom Layer w8: v1(1633,880) 1636.8,883.8 1652.8,883.8 1684,915 v1(1684,1014) ; v1(1676,1140) 1676.27,1140.27 1676.27,1209.27 1709,1242 v1(1710,1242)
NetC17_2: C17.2 R5.2 U1.6 | length 1025.1
  Top Layer w8: R5.2 1586,1545 1614.85,1516.15 1614.85,1445.62 ; v1(1614.85,1241.13) 1614.85,1445.62 ; v1(1616,1134) 1616,1128.31 1627,1117.31 v1(1627,1019) ; C17.2 1615.47,1445 1614.85,1445.62 ; v1(1680,853) 1683.39,849.61 U1.6
  Bottom Layer w8: v1(1614.85,1241.13) 1615,1240.99 1615,1135 v1(1616,1134) ; v1(1627,1019) 1627,989 1600,962 1600,824 1610.5,813.5 1640.5,813.5 v1(1680,853)
NetC18_2: C18.2 R34.1 R35.2 U1.12 Z3.1 | length 1938.3
  Top Layer w8: 970,1433.75 1006.25,1433.75 1022,1418 1022,1189 1076,1135 1188.23,1135 1388,935.23 1388,826 1464,750 1597,750 1666,681 v1(1666,607) ; v1(1889,657) 1898.5,666.5 U1.12
  Top Layer w16: Z3.1 869.5,1383 C18.2 R35.2 970,1433.75 R34.1
  Bottom Layer w8: v1(1666,607) 1839,607 v1(1889,657)
NetC19_2: C19.2 R36.2 U3.3 | length 190.9
  Top Layer w16: U3.3 1963.23,85.73 C19.2 R36.2
NetD4_1: D4.1 Z1.1 | length 105
  Top Layer w16: D4.1 Z1.1
NetD4_2: D4.2 T2.2 T2.4 TR1.4 | length 874.2
  Top Layer w40: D4.2 1579,1810 1580,1811 ; T2.2 1580,1811 ; TR1.4 1749.5,2243.5 1580,2074 T2.4 1580,1811
NetR4_1: R4.1 U1.31 | length 531.5
  Top Layer w8: U1.31 1835.51,1142.51 1852,1159 2212,1159 2219.25,1166.25 R4.1
NetR5_1: R5.1 U2.1 | length 1121.9
  Top Layer w8: v1(1280,2397) 1281.4,2398.4 U2.1 ; v1(1528.42,1625) 1559.46,1625 1636.18,1548.27 1670.23,1548.27 R5.1
  Bottom Layer w8: v1(1280,2397) 1436,2241 1436,1717.42 v1(1528.42,1625)
NetR6_2: R6.2 TR1.2 U2.4 Z1.2 | length 893
  Top Layer w8: U2.4 1451.77,2216.23 1472,2196 1522.5,2196 R6.2
  Top Layer w40: Z1.2 1389.5,1919 1389.5,1968.5 1519.82,2098.82 1519.82,2187.32 R6.2 ; R6.2@1522.07,2204.57 1586.57,2204.57 1751.49,2369.49 TR1.2
NetR7_1: R7.1 R8.2 | length 100
  Top Layer w8: R8.2 R7.1
NetR8_1: R8.1 R9.2 | length 102.5
  Top Layer w8: R9.2 R8.1
NetR10_1: R10.1 U1.18 | length 1756
  Top Layer w8: R10.1 1125.5,1247.5 1164,1209 1962,1209 v1(2002,1249) ; U1.18 2019.89,818.11 1985.31,852.69 1985.31,974.08 2035.9,1024.67 2042.67,1024.67 2110.41,1092.41 2175.41,1092.41 v1(2180,1097)
  Bottom Layer w8: v1(2002,1249) 2008.49,1249 2016.49,1257 2134,1257 2180,1211 v1(2180,1097)
NetR10_2: R10.2 T1.1 T3.1 | length 311
  Top Layer w16: R10.2 1182.5,1382.5 1185,1380 ; T1.1 1185,1380 ; T3.1 1185,1380
NetR11_1: R11.1 T1.2 T3.2 | length 375.3
  Top Layer w16: T1.2 T3.2 1260,1497 1300.5,1537.5 R11.1
NetR11_2: R11.2 R12.2 T2.1 | length 535.5
  Top Layer w16: R12.2 1377.5,1350 ; R11.2 1377.5,1350 ; T2.1 1489,1639 1449,1599 1449,1371.5 1427.5,1350 1377.5,1350
NetR14_1: R14.1 R15.2 TP2.1 | length 175
  Top Layer w8: R15.2 R14.1
NetR15_1: R15.1 R16.2 TP3.1 | length 175
  Top Layer w8: R16.2 R15.1
NetR16_1: R16.1 R17.2 TP4.1 | length 175
  Top Layer w8: R17.2 R16.1
NetR17_1: R17.1 R19.2 TP6.1 | length 175
  Top Layer w8: R19.2 R17.1
NetR18_1: R18.1 R22.2 T4.3 TP8.1 | length 281.6
  Top Layer w16: R18.1 R22.2 2837.5,391.5 2880,349 T4.3
NetR19_1: R19.1 R21.2 TP7.1 | length 175
  Top Layer w8: R21.2 R19.1
NetR21_1: R21.1 R25.2 TP9.1 | length 175
  Top Layer w8: R25.2 R21.1
NetR23_2: R23.2 T5.1 U1.14 | length 1597.7
  Top Layer w8: U1.14 1961.5,686.5 1987,661 v1(2148,661) ; v1(2148,591) 2392,591 2508,475 2508,314 2565.5,256.5 R23.2 2670.5,151.5 2741,81 2960,81 3012.87,133.87 3012.87,164.87 T5.1
  Bottom Layer w8: v1(2148,591) v1(2148,661)
NetR24_2: R24.2 T4.1 U1.15 | length 1836.1
  Top Layer w8: U1.15 1992.99,682.01 1999,676 2096,676 2111,691 2556,691 2630,765 2990,765 3047,708 3047,493 3045.5,491.5 ; R24.2 3045.5,491.5 ; T4.1 3109.5,311.5 3150,352 3150,462 3120.5,491.5 3045.5,491.5
NetR25_1: R25.1 R26.2 TP10.1 | length 175
  Top Layer w8: R26.2 R25.1
NetR26_1: R26.1 R27.2 TP11.1 | length 175
  Top Layer w8: R27.2 R26.1
NetR27_1: R27.1 R28.2 TP12.1 | length 175
  Top Layer w8: R28.2 R27.1
NetR29_1: R29.1 R31.2 TP14.1 U3.1 | length 314.3
  Top Layer w16: R31.2 1935.5,360 TP14.1 1850.5,248 1852.9,250.4 U3.1
NetR30_1: R30.1 R33.2 TP16.1 U1.9 | length 1448.9
  Top Layer w16: TP16.1 1252.5,226.5 1253,227 ; R30.1 1337.87,167.13 1337.87,207.13 1318,227 1253,227 ; U1.9 1804.02,464.02 1787,447 1203,447 1125,369 R33.2 1125,248 1146,227 1253,227
NetR31_1: R31.1 R32.2 U3.4 | length 364.2
  Top Layer w16: U3.4 2123.6,175.6 2173,225 R32.2 R31.1
NetR36_1: R36.1 U1.10 U1.13 | length 1060.3
  Top Layer w8: U1.10 1835.51,658.49 1881,613 1930,613 ; U1.13 1930,613 ; v1(1969,613) 1930,613 ; v1(2048,590) 2100,590 2238,452 2238,241 2197.5,200.5 R36.1
  Bottom Layer w8: v1(1969,613) 1992,590 v1(2048,590)
NetR37_1: R37.1 U1.19 | length 148.5
  Top Layer w8: U1.19 2125.61,849.61 2162,886 R37.1
NetR38_1: R38.1 U1.20 | length 214.8
  Top Layer w8: U1.20 2125.1,881.1 2143,899 2143,963 2167,987 R38.1
NetR39_1: R39.1 T5.3 | length 372.9
  Top Layer w16: R39.1 2875.13,486.88 2875.13,446.87 2911,411 2950,411 2978,383 2978,303 2934.5,259.5 T5.3
NetTP17_1: TP17.1 U1.22 | length 414.1
  Top Layer w8: v1(2015,919) 2015.63,919 2040.72,944.09 U1.22 ; v1(2257,1046) TP17.1
  Bottom Layer w8: v1(2015,919) 2099,919 2226,1046 v1(2257,1046)
NetTP18_1: TP18.1 U1.27 | length 73.3
  Top Layer w8: U1.27 1968.01,1070.21 1968.01,1099.01 TP18.1
NetTP19_1: TP19.1 U1.28 | length 62
  Top Layer w8: U1.28 1930,1120 TP19.1
NetTP20_1: TP20.1 U1.29 | length 70
  Top Layer w8: TP20.1 1898.5,1100.5 U1.29
NRST: P1.12 R3.2 U1.4 | length 1654.5
  Top Layer w8: P1.12 792,510 R3.2 1615.5,507 1659,507 1694,542 1694,681 1604,771 1604,896 1620.6,912.6 U1.4
RX: P1.13 P2.4 R38.2 | length 2337.4
  Top Layer w8: P2.4 317,748 P1.13 554,749.8 622.2,818 1212.26,818 1284,746.26 v1(1284,709) ; v1(2282,987) R38.2
  Bottom Layer w8: v1(1284,709) 1285,708 1636.2,708 1814.35,886.15 2181.15,886.15 v1(2282,987)
SCL: P3.3 R2.2 U1.25 | length 2839.9
  Top Layer w8: v1(479,398) 546.4,398 R2.2 ; v1(1934,992) 1976.28,992 2016.68,1032.4 2016.68,1055.89 U1.25
  Bottom Layer w8: P3.3 337,820 337,540 v1(479,398) 1128,398 1238,508 1238,714.2 1270.8,747 1327,747 1346,728 1624,728 1816,920 1862.17,920 1934,991.83 v1(1934,992)
SDA: P3.2 R1.2 U1.30 | length 2698.1
  Top Layer w8: v1(647,475) 647,397.4 R1.2 ; U1.30 1867.01,995.99 v1(1868,995)
  Bottom Layer w8: P3.2 605.51,1101.49 605.51,1025.51 573,993 541,993 389,841 389,611 525,475 v1(647,475) 1168,475 1224,531 1224,720 1267,763 1330.8,763 1345.8,748 1618,748 1717,847 1717,874.27 1837.73,995 v1(1868,995)
SWCLK: P1.6 U1.24 | length 1738.7
  Top Layer w8: U1.24 2129.09,1007.09 v1(2146.55,1024.55)
  Bottom Layer w8: P1.6 1006,700 1006,1003 1136,1133 1268,1133 1341,1060 1418.4,1060 1459.4,1101 1936.6,1101 2032.6,1005 2127,1005 v1(2146.55,1024.55)
SWDIO: P1.4 U1.23 | length 1455.7
  Top Layer w8: v1(2016,968) 2022.49,968 2029.49,975 2080.51,975 U1.23
  Bottom Layer w8: P1.4 1102,696 1102,994 1154,1046 1424.2,1046 1465.2,1087 1930.8,1087 2000,1017.8 2000,984.69 2016,968.69 v1(2016,968)
TX: P1.14 P2.5 R37.2 | length 2447.1
  Top Layer w8: P2.5 318,649 553,649 P1.14 604,698 604,780 628,804 1199,804 1248.5,754.5 1248.5,684.5 v1(1280,653)
  Top Layer w16: v1(2282,886) R37.2
  Bottom Layer w8: v1(1280,653) 1601,653 1818,870 2170,870 2181,859 2255,859 v1(2282,886)
pads on no net: H1.1 H2.1 H3.1 H4.1 P1.1 P1.2 P1.8 P1.9 P1.10 P2.2 P2.6 TR1.1 TR1.3 TR1.5 TR1.8 U1.11 U1.21 U1.26

## Polygon pours and split planes (outlines as drawn)
GND on Bottom Layer "GND_L02_P000" (solid, remove dead copper, pour order 0): 0,2559.06 3543.31,2559.06 3543.31,0 0,0

## Silkscreen, mask and mechanical layers (free items; w line width, h text height)
Top Overlay:
  text "3V3" at 390,1224 h40
  text "SDA" at 390,1125 h40
  text "SCL" at 390,1027 h40
  text "High Voltage!" at 2673,988.33 h40
  text "e" at 2695.22,954.34 h600
  text "GND" at 390,922 h40
Bottom Overlay:
  text "High Voltage Power Supply / hv_psu_v100 / Designed by Mihaly Szabo" at 3443,1052 h40
Mechanical 1:
  the board outline again, w10

## Text inside footprints (layer, text, board x,y; h text height)
P1: Top Overlay "2" at 1274,668 h30 r180; Top Overlay "1" at 1274,768 h30 r180; Top Overlay "14" at 474,668 h30 r180; Top Overlay "13" at 474,768 h30 r180